# Altium PCB InterfaceBoard.PcbDoc
Units mil, origin at the board's own origin, x right, y up, seen from the top; angles counter-clockwise.
Board outline 3855 x 3822.5 mil, 2 copper layers (Top Layer, Bottom Layer); 52 components, 44 nets, 196 pads, 0 vias.
Unrouted connection lines stored in the file: 98.
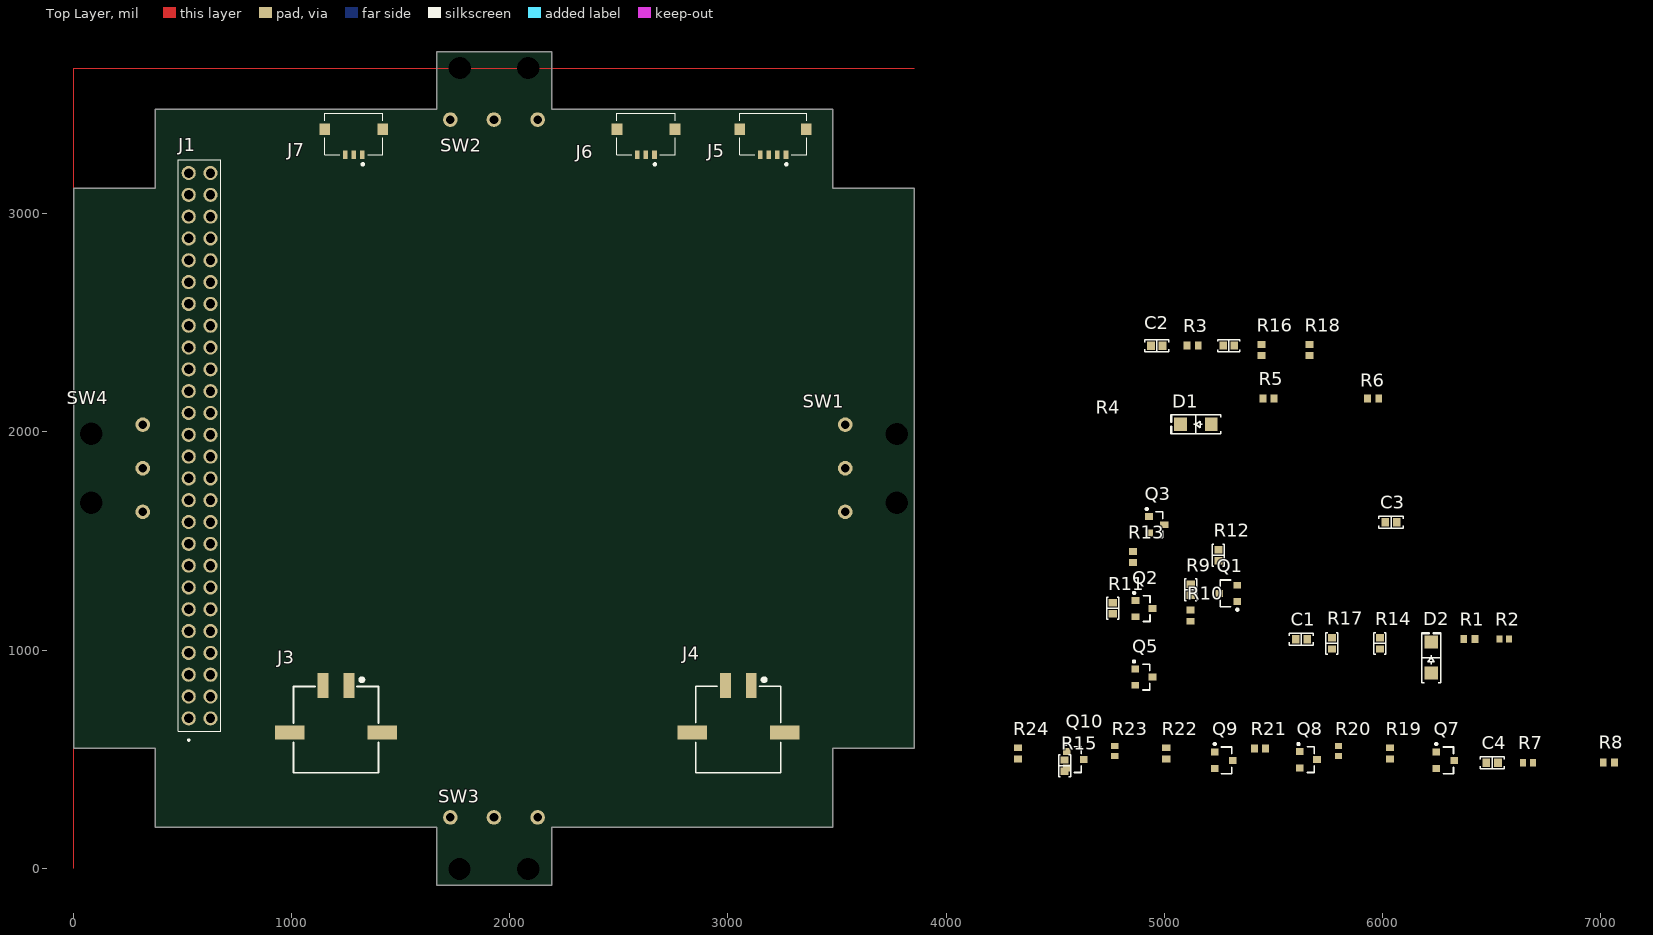
[diagram p0: Top Layer view]
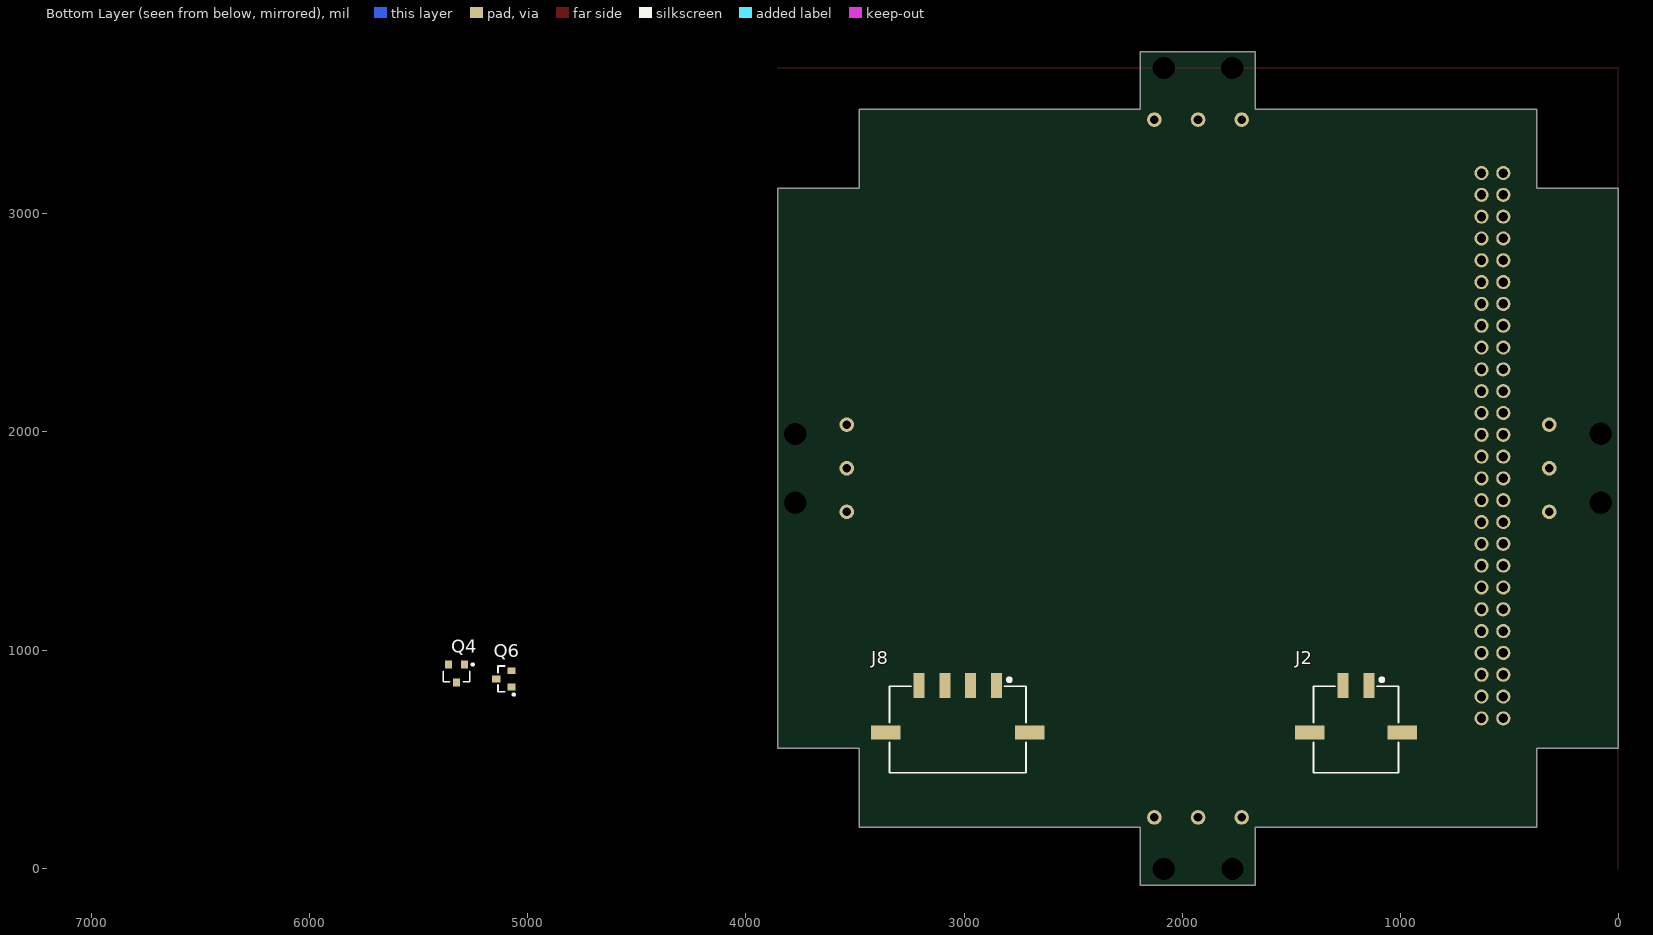
[diagram p1: Bottom Layer view, seen from below]

## Layer stack, top to bottom
Top Solder: solder mask 0.4, Solder Resist, Dk 3.5
Top Layer: signal copper 1.4
Dielectric 1: dielectric 12.6, FR-4, Dk 4.8
Bottom Layer: signal copper 1.4
Bottom Solder: solder mask 0.4, Solder Resist, Dk 3.5

## Board outline
375,3479.5 375,3117 0,3117 0,550 375,550 375,187.5 1666,187.5 1666,-78.5 2192,-78.5 2192,187.5 3480,187.5 3480,550 3853.5,550 3855,554.5 3855,3117 3480,3117 3480,3479.5 2192,3479.5 2192,3744 1666,3744 1666,3479.5

## Design rules (kind name [scope] priority, off if disabled: settings)
Clearance [All] p1: gap=10 ignorepadtopadclearanceinfootprint=FALSE except(0: Arc-Hole Track-Hole SMDPad-Hole THPad-Hole Via-Hole Fill-Hole Poly-Hole Region-Hole Text-Hole)
NetsToIgnore [InNet('GND')] p1 off:
PolygonConnect [All] p1: connectstyle=Relief reliefconductorwidth=10 reliefentries=4 polygonreliefangle="90 Angle" airgapwidth=10
RoutingVias [All] p1: holewidth=28 width=50 viastyle="Through Hole" minholewidth=28 minwidth=50 maxholewidth=28 maxwidth=50
SolderMaskExpansion [All] p1: expansion=4
Width [All] p1: maxlimit=50 minlimit=10 preferedwidth=10 minimp=50.000000 maximp=50.000000 favimp=50.000000
30 further rules are at their usual default settings.

## Classes and differential pairs
component class MEZZANINE: J1
component class EMatches: D1 D2 J2 J3 J8 Q1 Q2 Q3 Q4 Q5 Q6 R1 R2 R3 R4 R5 R6 R7 R8 R9 R10
component class Buzzer_and_Solenoid: J4 LS1 Q7 Q8 Q9 Q10 R19 R20 R21 R22 R23 R24
component class Board_Conns: J5 J6 J7
component class Deploy_Switches: C1 C2 C3 C4 R11 R12 R13 R14 R15 R16 R17 R18 SW1 SW2 SW3 SW4

## Components (designator, comment, footprint, x,y, rotation, side; value= is the part's Value field where it differs from the comment)
C1 "10000pF" "CAP 0603_1608" 5629.35,1050.5 r0 top
C2 "10000pF" "CAP 0603_1608" 4966,2396 r0 top
C3 "10000pF" "CAP 0603_1608" 6040,1586.5 r0 top
C4 "10000pF" "CAP 0603_1608" 6503.5,484 r0 top
D1 "Red" "LED 1206_3216 RED" 5145,2035 r180 top
D2 "Red" "LED 1206_3216 RED" 6224.35,965.5 r90 top
J1 "ESQ-126-39-G-D" SAMTEC_ESQ-126-39-G-D 528,687 r90 top
J2 "662102145021" 662102145021 1203.1,635.71 r180 bottom locked
J3 "662102145021" 662102145021 1203.55,635.43 r0 top locked
J4 "662102145021" 662102145021 3047.9,635.71 r0 top locked
J5 "SCH - CONNECTORS - 4 PIN + SHIELD" "PCB - CONNECTOR - MOLEX - PICO-LOCK 5037630491" 3207,3270.28 r180 top locked
J6 "SCH - CONNECTORS - 3 PIN + SHIELD" "PCB - CONNECTOR - MOLEX - PICO-LOCK 5037630391" 2624.19,3270.28 r180 top locked
J7 "SCH - CONNECTORS - 3 PIN + SHIELD" "PCB - CONNECTOR - MOLEX - PICO-LOCK 5037630391" 1285.2,3270.28 r180 top locked
J8 "662104145021" 662104145021 3028.99,635.71 r180 bottom locked
Q1 "SSM3J328R,LF" TOSH-SOT-23F_V 5294.34,1260 r180 top
Q2 "NTR4003NT3G" "ON SEMI SOT-23-3" 4907.5,1190 r0 top
Q3 "IRLML6344TRPBF" "INFINEON SOT-23-3" 4965.5,1574.5 r0 top
Q4 "SSM3J328R,LF" TOSH-SOT-23F_V 5327,892.5 r270 bottom
Q5 "NTR4003NT3G" "ON SEMI SOT-23-3" 4907,876 r0 top
Q6 "IRLML6344TRPBF" "INFINEON SOT-23-3" 5109.5,868 r0 bottom
Q7 "SSM3J328R,LF" TOSH-SOT-23F_V 6289,494.5 r0 top
Q8 "NTR4003NT3G" "ON SEMI SOT-23-3" 5661,497.5 r0 top
Q9 "SSM3J328R,LF" TOSH-SOT-23F_V 5273,494.5 r0 top
Q10 "NTR4003NT3G" "ON SEMI SOT-23-3" 4592.5,497.5 r0 top
R1 "CRCW060310K0FKEA" RESC1609X50X30NL8T20 6399.35,1050.5 r0 top value=10k
R2 "CRCW060312K0FKEA" RESC1609X50X30LL10T20 6559.35,1050.5 r0 top value=12k
R3 "CRCW060310K0FKEA" RESC1609X50X30NL8T20 5131,2396 r0 top value=10k
R4 "510 Ohms" "RES 0603_1608" 5296,2396 r0 top
R5 "CRCW060310K0FKEA" RESC1609X50X30NL8T20 5478,2154 r0 top value=10k
R6 "CRCW060310K0FKEA" RESC1609X50X30NL8T20 5958,2154 r0 top value=10k
R7 "CRCW060312K0FKEA" RESC1609X50X30LL10T20 6668.5,484 r0 top value=12k
R8 "CRCW060310K0FKEA" RESC1609X50X30NL8T20 7038.5,484 r0 top value=10k
R9 "510 Ohms" "RES 0603_1608" 5122,1276.5 r90 top
R10 "CRCW060310K0FKEA" RESC1609X50X30NL8T20 5120.5,1157.5 r90 top value=10k
R11 "1 kOhms" "RES 0603_1608" 4764,1192 r270 top value=10k
R12 "1 kOhms" "RES 0603_1608" 5248.5,1435 r90 top
R13 "CRCW060310K0FKEA" RESC1609X50X30NL8T20 4857.5,1426.91 r270 top value=10k
R14 "1 kOhms" "RES 0603_1608" 5989.35,1030.5 r90 top
R15 "1 kOhms" "RES 0603_1608" 4543.5,470 r90 top value=10k
R16 "CRCW060310K0FKEA" RESC1609X50X30NL8T20 5446,2376 r90 top value="1 kOhms"
R17 "1 kOhms" "RES 0603_1608" 5769.35,1030.5 r90 top value=10k
R18 "CRCW060310K0FKEA" RESC1609X50X30NL8T20 5666,2376 r90 top value="1 kOhms"
R19 "CRCW060310K0FKEA" RESC1609X50X30NL8T20 6035.5,526.5 r90 top value=10k
R20 "CRCW060312K0FKEA" RESC1609X50X30LL10T20 5799.5,536.5 r90 top value=12k
R21 "CRCW060310K0FKEA" RESC1609X50X30NL8T20 5439.5,548.5 r0 top value=10k
R22 "CRCW060310K0FKEA" RESC1609X50X30NL8T20 5009.5,526.5 r90 top value=10k
R23 "CRCW060312K0FKEA" RESC1609X50X30LL10T20 4773.5,536.5 r90 top value=12k
R24 "CRCW060310K0FKEA" RESC1609X50X30NL8T20 4329.5,526.5 r90 top value=10k
SW1 "D2HW-BR231DR" D2HW-BR231 3537.78,1923.5 r270 top locked
SW2 "D2HW-BR231DR" D2HW-BR231 1837.5,3432 r0 top locked
SW3 "D2HW-BR231DR" D2HW-BR231 2017.5,232.72 r180 top
SW4 "D2HW-BR231DR" D2HW-BR231 317.3,1743.5 r90 top locked

## Footprints (in the part's own frame and the unit in brackets; to place one, negate y for a bottom-side part, rotate by r counter-clockwise, add the part's x,y. Pads: shape width x height; smd on the part's side, far side on the other; paste and mask are expansions set on the pad)
662102145021 [mm] "3.00mm Male Single Row Angled Header, 2p"
  rect 1.27x2.92 smd: 1(1.5,5.12) 2(-1.5,5.12)
  rect 3.43x1.65 smd: MP1(-5.395,-0.35) MP2(5.395,-0.35)
  silkscreen extent -4.95,-5.02 4.95,6, body extent -6.82,-4.95 6.82,6.4, height 5.61
662104145021 [mm] "3.00mm Male Single Row Angled Header, 4p"
  rect 1.27x2.92 smd: 1(4.5,5.12) 2(1.5,5.12) 3(-1.5,5.12) 4(-4.5,5.12)
  rect 3.43x1.65 smd: MP1(-8.395,-0.35) MP2(8.395,-0.35)
  silkscreen extent -7.95,-5.02 7.95,6, body extent -9.82,-4.95 9.82,6.4, height 5.61
"CAP 0603_1608" [mm] "Chip Capacitor, 2-Leads, Body 1.60x0.80mm, IPC Medium Density"
  rect 0.9x1 smd: 1(-0.675,0) 2(0.675,0)
  silkscreen extent -1.4,-0.7 1.4,0.7, body extent -0.8,-0.41 0.8,0.41, height 0.82
D2HW-BR231 [mm]
  round 1.7 hole 1: 1(-2.794,0) 2(7.366,0) 3(2.286,0)
  round 1.524 hole 2.6 unplated: MH1(-1.711,6) MH2(6.29,6)
"INFINEON SOT-23-3" [mm] "SOT23, 3-Leads, Body 2.90x2.40mm, Pitch 0.95mm, IPC Medium Density"
  rect 0.972x0.802 smd: 1(-0.885,0.95) 2(-0.885,-0.95) 3(0.885,0)
  silkscreen extent -1.27,-1.5 0.7,1.95, body extent -1.16,-1.45 1.16,1.45, height 1
"LED 1206_3216 RED" [mm] "Chip Diode, 2-Leads, Body 3.13x1.55mm, IPC Medium Density"
  rect 1.5x1.6 smd: 1(-1.8,0) 2(1.8,0)
  silkscreen extent -2.92,-1.1 2.92,1.1, body extent -1.6,-0.8 1.6,0.8, height 0.9
"ON SEMI SOT-23-3" [mm] "SOT23, 3-Leads, Body 2.90x2.40mm, Pitch 0.95mm, IPC Medium Density"
  rect 0.9x0.8 smd: 1(-1,0.95) 2(-1,-0.95) 3(1,0)
  silkscreen extent -1.27,-1.5 0.7,1.95, body extent -1.16,-1.45 1.16,1.45, height 1
"PCB - CONNECTOR - MOLEX - PICO-LOCK 5037630391" [mm]
  rect 0.55x1 smd: 1(-0.992,0) 2(0.008,0) 3(1.008,0)
  rect 1.26x1.3 smd: S1(3.383,-2.99) S2(-3.367,-2.99)
  silkscreen extent -3.39,-4.86 3.41,1.2, body extent -3.82,-4.88 3.78,0.31, height 1.47
"PCB - CONNECTOR - MOLEX - PICO-LOCK 5037630491" [mm]
  rect 0.55x1 smd: 1(-1.5,0) 2(-0.5,0) 3(0.5,0) 4(1.5,0)
  rect 1.26x1.3 smd: S1(3.875,-2.99) S2(-3.875,-2.99)
  silkscreen extent -3.9,-4.86 3.9,1.2, body extent -4.32,-4.88 4.28,0.31, height 1.47
"RES 0603_1608" [mm] "Chip Resistor, 2-Leads, Body 1.60x0.80mm, IPC Medium Density"
  rect 0.85x0.95 smd: 1(-0.65,0) 2(0.65,0)
  silkscreen extent -1.27,-0.7 1.27,0.7, body extent -0.8,-0.4 0.8,0.4, height 0.45
RESC1609X50X30LL10T20 [mm] "Chip Resistor, 2-Leads, Body 1.55x0.85mm, IPC High Density"
  rect 0.7x0.85 smd: 1(-0.575,0) 2(0.575,0)
  body extent -0.82,-0.48 0.82,0.48, height 0.5
RESC1609X50X30NL8T20 [mm] "Chip Resistor, 2-Leads, Body 1.65x0.95mm, IPC Medium Density"
  rect 0.8x0.95 smd: 1(-0.65,0) 2(0.65,0)
  body extent -0.82,-0.48 0.82,0.48, height 0.5
SAMTEC_ESQ-126-39-G-D [mm]
  round 1.65 hole 1.1: 1(0,0) 2(0,-2.54) 3(2.54,0) 4(2.54,-2.54) 5(5.08,0) 6(5.08,-2.54) 7(7.62,0) 8(7.62,-2.54) 9(10.16,0) 10(10.16,-2.54) 11(12.7,0) 12(12.7,-2.54) 13(15.24,0) 14(15.24,-2.54) 15(17.78,0) 16(17.78,-2.54) 17(20.32,0) 18(20.32,-2.54) 19(22.86,0) 20(22.86,-2.54) 21(25.4,0) 22(25.4,-2.54) 23(27.94,0) 24(27.94,-2.54) 25(30.48,0) 26(30.48,-2.54) 27(33.02,0) 28(33.02,-2.54) 29(35.56,0) 30(35.56,-2.54) 31(38.1,0) 32(38.1,-2.54) 33(40.64,0) 34(40.64,-2.54) 35(43.18,0) 36(43.18,-2.54) 37(45.72,0) 38(45.72,-2.54) 39(48.26,0) 40(48.26,-2.54) 41(50.8,0) 42(50.8,-2.54) 43(53.34,0) 44(53.34,-2.54) 45(55.88,0) 46(55.88,-2.54) 47(58.42,0) 48(58.42,-2.54) 49(60.96,0) 50(60.96,-2.54) 51(63.5,0) 52(63.5,-2.54)
  silkscreen extent -2.64,-3.74 65.03,1.2
TOSH-SOT-23F_V [mm] "SOTFL, 3-Leads, Body 3.1x1.9mm, Pitch 0.95mm"
  rect 0.9x0.8 smd: 1(-1.05,0.95) 2(-1.05,-0.95) 3(1.05,0)
  silkscreen extent -1.18,-1.55 0.95,2.02, body extent -1.2,-1.55 1.2,1.55, height 0.88

## Part data
C1 C2 C3 C4: library part C0603S103K4RACTU, "CAP CER 10000PF 16V X7R 0603", Device Package="0603 (1608 Metric)", Manufacturer=KEMET, Operating Temperature="-55°C ~ 125°C", Supplier Part Number 1=399-9135-1-ND, Temperature Coefficient=X7R, Tolerance=±10%, Voltage - Rated=16V, Applications="Boardflex Sensitive", Capacitance=10000pF, ComponentLink1Description=Datasheet, ComponentLink1URL=https://api.kemet.com/component-edge/download/datasheet/C0603S103K4RACTU.pdf, ComponentLink2Description="DigiKey Link", ComponentLink2URL=http://digikey.com/product-detail/en/kemet/C0603S103K4RACTU/399-9135-1-ND/3522653, Features="Floating Electrode", LastUpdated="1/21/2020 12:02:08 AM", Lifecycle Status=Active, Minimum Order=1, Mounting Type="Surface Mount, MLCC", Package / Case="0603 (1608 Metric)", Packaging=TapeAndReel, PartId=3312, Part Number=C0603S103K4RACTU, Part Status=Active, Price=0.07, Series="SMD Comm X7R FE", Size / Dimension="0.063\" L x 0.031\" W (1.60mm x 0.80mm)", Supplier 1=DigiKey, Thickness (Max)="0.034\" (0.87mm)"
D1 D2: library part HSMC-C350, "LED RED CHIP SMD", Current - Test=20mA, Device Package="1206 (3216 Metric)", Lens Color=1.20mm, Manufacturer="Broadcom Limited", Supplier Device Package="Chip LED", Supplier Part Number 1=516-4369-1-ND, Voltage - Forward (Vf) (Typ)=2V, Color=Red, ComponentLink1Description=Datasheet, ComponentLink1URL=https://docs.broadcom.com/docs/HSMC-C350-DS100, ComponentLink2Description="DigiKey Link", ComponentLink2URL=http://digikey.com/product-detail/en/broadcom-limited/HSMC-C350/516-4369-1-ND/10239796, Configuration=Standard, Height (Max)=1.20mm, LastUpdated="1/21/2020 3:14:28 AM", Lens Size="1.10mm Dia", Lens Style="Round with Domed Top", Lifecycle Status=Active, Minimum Order=1, Mounting Type="Surface Mount", Package / Case="1206 (3216 Metric)", Packaging=TapeAndReel, PartId=195, Part Number=HSMC-C350, Part Status=Active, Price=0.21, Series=-, Size / Dimension="3.20mm L x 1.60mm W", Supplier 1=DigiKey, Viewing Angle=70°, Wavelength - Dominant=630nm, Wavelength - Peak=643nm
J1: "52 Position Elevated Socket Connector Through Hole", Package=None, Digi-Key_Part_Number=SAM10462-ND, Digi-Key_Purchase_URL=https://www.digikey.com/product-detail/en/samtec-inc/ESQ-126-39-G-D/SAM10462-ND/3601055?utm_source=snapeda&utm_medium=aggregator&utm_campaign=symbol, MF=Samtec, MP=ESQ-126-39-G-D, SnapEDA_Link=https://www.snapeda.com/parts/ESQ-126-39-G-D/Samtec%20Inc./view-part/490181/?ref=snap
J2 J3 J4: library part CMP-1502-00482-1, "SMT Male Header WR-MPC3, with SMT Solder Tabs, Right Angled, Single Row, pitch 3 mm, 2 pins", Contact Resistance=10mOhm, Manufacturer="Wurth Elektronik", Operating Temperature=-40to105degC, Working Voltage=250VAC, Datasheet URL=https://katalog.we-online.de/em/datasheet/6621xx145021.pdf, Gender=Male, Manufacturer URL=http://www.we-online.de, Mounting Technology=SMT, Orientation=RightAngled, Package Reference=662102145021, Packaging=TapeandReel, Part Number=662102145021, Pin Number=2, Pitch=3mm, Publisher=WurthElektronik
J5 J6: "Connector Header Surface Mount, Right Angle 4 position 0.039 _1.00mm_", Package=None, Availability=Unavailable, MF=Molex, MP=5037630491, Price=None, SnapEDA_Link=https://www.snapeda.com/parts/5037630491/Molex/view-part/3215405/?ref=snap
J7: "Connector Header Surface Mount, Right Angle 4 position 0.039 _1.00mm_", Contact Resistance=10mOhm, Manufacturer="Wurth Elektronik", Operating Temperature=-40to105degC, Package Reference=662103145021, Working Voltage=250VAC, Datasheet URL=https://katalog.we-online.de/em/datasheet/6621xx145021.pdf, Gender=Male, Manufacturer URL=http://www.we-online.de, Mounting Technology=SMT, Orientation=RightAngled, Packaging=TapeandReel, Part Number=662103145021, Pin Number=3, Pitch=3mm, Publisher=WurthElektronik
J8: library part CMP-1502-00484-1, "SMT Male Header WR-MPC3, with SMT Solder Tabs, Right Angled, Single Row, pitch 3 mm, 4 pins", Contact Resistance=10mOhm, Manufacturer="Wurth Elektronik", Operating Temperature=-40to105degC, Working Voltage=250VAC, Datasheet URL=https://katalog.we-online.de/em/datasheet/6621xx145021.pdf, Gender=Male, Manufacturer URL=http://www.we-online.de, Mounting Technology=SMT, Orientation=RightAngled, Package Reference=662104145021, Packaging=TapeandReel, Part Number=662104145021, Pin Number=4, Pitch=3mm, Publisher=WurthElektronik
Q1 Q4 Q7 Q9: library part CMP-2100-03686-1, "TOSHIBA Field-Effect Transistor Silicon P-Channel MOS Type (U-MOS VI), 20 V, -55 to 125 degC, 3-Pin SOTFL, RoHS, Tape and Reel", Case/Package=SOT-23-3, Continuous Drain Current (ID)=6A, Drain to Source Breakdown Voltage=-20V, Drain to Source Resistance=47.4mOhm, Drain to Source Voltage (Vdss)=20V, Gate to Source Voltage (Vgs)=8V, Input Capacitance=840pF, Manufacturer=Toshiba, Max Operating Temperature=150degC, Max Power Dissipation=1W, Min Operating Temperature=-55degC, Package Description="3-Pin Small Outline Transistor, Flat Lead, Body 2.9 x 1.8 mm, Pitch 0.95 mm", Package Quantity=3000, Package Reference=SOT-23F, Power Dissipation=2W, Datasheet URL=https://toshiba.semicon-storage.com/info/docget.jsp?did=2429&prodName=SSM3J328R, Datasheet Version=41699.0, Element Configuration=Single, Manufacturer URL=http://www.toshiba.com/, Mount=SurfaceMount, Number of Channels=1, Number of Elements=1, Number of Pins=3, Package URL=https://toshiba.semicon-storage.com/ap-en/design-support/package/detail.SOT-23F.html, Packaging=TapeandReel, Radiation Hardening=No, Rds On Max=29.8mOhm, RoHSCompliant=true, Turn-Off Delay Time=107ns, Turn-On Delay Time=32ns
Q2 Q5 Q8 Q10: "MOSFET N-CH 30V 500MA SOT-23", Current - Continuous Drain (Id) @ 25°C="500mA (Ta)", Device Package="TO-236-3, SC-59, SOT-23-3", Drain to Source Voltage (Vdss)=30V, Drive Voltage (Max Rds On,  Min Rds On)="2.5V, 4V", Input Capacitance (Ciss) (Max) @ Vds="21pF @ 5V", Manufacturer="ON Semiconductor", Operating Temperature="-55°C ~ 150°C (TJ)", Power Dissipation (Max)="690mW (Ta)", Supplier Device Package="SOT-23-3 (TO-236)", Supplier Part Number 1=NTR4003NT3GOSCT-ND, ComponentLink1Description=Datasheet, ComponentLink1URL=http://www.onsemi.com/pub/Collateral/NTR4003N-D.PDF, ComponentLink2Description="DigiKey Link", ComponentLink2URL=http://digikey.com/product-detail/en/on-semiconductor/NTR4003NT3G/NTR4003NT3GOSCT-ND/1967271, FET Type=N-Channel, Gate Charge (Qg) (Max) @ Vgs="1.15nC @ 5V", LastUpdated="1/21/2020 4:01:12 AM", Lifecycle Status=Active, Minimum Order=1, Mounting Type="Surface Mount", Package / Case="TO-236-3, SC-59, SOT-23-3", Packaging=TapeAndReel, Part Number=NTR4003NT3G, Part Status=Active, Price=0.04, Rds On (Max) @ Id, Vgs="1.5Ohm @ 10mA, 4V", Series=-, Supplier 1=DigiKey, Technology="MOSFET (Metal Oxide)", Vgs (Max)=±20V, Vgs(th) (Max) @ Id="1.4V @ 250µA"
Q3 Q6: "MOSFET N-CH 30V 5A SOT23", Current - Continuous Drain (Id) @ 25°C="5A (Ta)", Device Package="TO-236-3, SC-59, SOT-23-3", Drain to Source Voltage (Vdss)=30V, Drive Voltage (Max Rds On,  Min Rds On)="2.5V, 4.5V", Input Capacitance (Ciss) (Max) @ Vds="650pF @ 25V", Manufacturer="Infineon Technologies", Operating Temperature="-55°C ~ 150°C (TJ)", Power Dissipation (Max)="1.3W (Ta)", Supplier Device Package=Micro3™/SOT-23, Supplier Part Number 1=IRLML6344TRPBFCT-ND, ComponentLink1Description=Datasheet, ComponentLink1URL=https://www.infineon.com/dgdl/irlml6344pbf.pdf?fileId=5546d462533600a4015356689c44262c, ComponentLink2Description="DigiKey Link", ComponentLink2URL=http://digikey.com/product-detail/en/infineon-technologies/IRLML6344TRPBF/IRLML6344TRPBFCT-ND/2538168, FET Type=N-Channel, Gate Charge (Qg) (Max) @ Vgs="6.8nC @ 4.5V", LastUpdated="1/21/2020 4:00:48 AM", Lifecycle Status=Active, Minimum Order=1, Mounting Type="Surface Mount", Package / Case="TO-236-3, SC-59, SOT-23-3", Packaging=TapeAndReel, Part Number=IRLML6344TRPBF, Part Status=Active, Price=0.12, Rds On (Max) @ Id, Vgs="29mOhm @ 5A, 4.5V", Series=HEXFET®, Supplier 1=DigiKey, Technology="MOSFET (Metal Oxide)", Vgs (Max)=±12V, Vgs(th) (Max) @ Id="1.1V @ 10µA"
R1 R3 R5 R6 R8 R10 R11 R13 R15 R17 R19 R21 R22 R24: library part CMP-1666-00005-4, "Chip Resistor, 10 KOhm, +/- 1%, 100 mW, -55 to 155 degC, 0603 (1608 Metric), RoHS, Tape and Reel", Manufacturer="Vishay Semiconductor", Max Operating Temperature="155 degC", Min Operating Temperature="-55 degC", Package Quantity=5000, Voltage Rating="75 V", ComponentLink1Description="Manufacturer URL", ComponentLink1URL=http://www.vishay.com/, ComponentLink2Description=Datasheet, ComponentLink2URL=https://datasheet.ciiva.com/11809/0900766b80d98afc-11809037.pdf, DatasheetVersion=06/2012, Height="0.45 mm", Length="1.55 mm", Mounting Technology="Surface Mount", PackageDescription="2-Pin Surface Mount Device, Body 1.575 x 0.85 mm", PackageReference=0603, Packaging="Tape and Reel", REACH SVHC=Unknown, RoHSCompliant=true
R2 R7 R20 R23: library part CMP-2000-03877-1, Manufacturer="Vishay Dale", Part Number=CRCW060312K0FKEA
R4 R9: library part CRCW0603510RFKEAHP, "RES SMD 510 OHM 1% 1/4W 0603", Device Package="0603 (1608 Metric)", Manufacturer="Vishay Dale", Operating Temperature="-55°C ~ 155°C", Power (Watts)="0.25W, 1/4W", Ratings=AEC-Q200, Supplier Device Package=0603, Supplier Part Number 1=541-510SCT-ND, Temperature Coefficient=±100ppm/°C, Tolerance=±1%, ComponentLink1Description=Datasheet, ComponentLink1URL=http://www.vishay.com/docs/20043/crcwhpe3.pdf, ComponentLink2Description="DigiKey Link", ComponentLink2URL=http://digikey.com/product-detail/en/vishay-dale/CRCW0603510RFKEAHP/541-510SCT-ND/5326852, Composition="Thick Film", Features="Automotive AEC-Q200, Pulse Withstanding", Height - Seated (Max)="0.022\" (0.55mm)", LastUpdated="1/21/2020 12:20:58 AM", Lifecycle Status=Active, Minimum Order=1, Number of Terminations=2, Package / Case="0603 (1608 Metric)", Packaging=TapeAndReel, PartId=14772, Part Number=CRCW0603510RFKEAHP, Part Status=Active, Price=0.02, Resistance="510 Ohms", Series=CRCW-HP, Size / Dimension="0.063\" L x 0.033\" W (1.60mm x 0.85mm)", Supplier 1=DigiKey
R12 R14: library part CPF0603B1K0E, "RES SMD 1K OHM 0.1% 1/16W 0603", Device Package="0603 (1608 Metric)", Manufacturer="TE Connectivity Passive Product", Operating Temperature="-55°C ~ 155°C", Power (Watts)="0.063W, 1/16W", Supplier Device Package=0603, Supplier Part Number 1=A119887CT-ND, Temperature Coefficient=±25ppm/°C, Tolerance=±0.1%, ComponentLink1Description=Datasheet, ComponentLink1URL=https://www.te.com/commerce/DocumentDelivery/DDEController?Action=srchrtrv&DocNm=1773200&DocType=DS&DocLang=English, ComponentLink2Description="DigiKey Link", ComponentLink2URL=http://digikey.com/product-detail/en/te-connectivity-passive-product/CPF0603B1K0E/A119887CT-ND/4966485, Composition="Thin Film", Height - Seated (Max)="0.022\" (0.55mm)", LastUpdated="1/21/2020 12:24:55 AM", Lifecycle Status=Active, Minimum Order=1, Number of Terminations=2, Package / Case="0603 (1608 Metric)", Packaging=TapeAndReel, PartId=4877, Part Number=CPF0603B1K0E, Part Status=Active, Price=0.09, Resistance="1 kOhms", Series="CPF, Neohm", Size / Dimension="0.061\" L x 0.031\" W (1.55mm x 0.80mm)", Supplier 1=DigiKey
R16 R18: library part CPF0603B1K0E, "RES SMD 1K OHM 0.1% 1/16W 0603", Device Package="0603 (1608 Metric)", Manufacturer="TE Connectivity Passive Product", Operating Temperature="-55°C ~ 155°C", Power (Watts)="0.063W, 1/16W", Resistance="1 kOhms", Supplier Device Package=0603, Supplier Part Number 1=A119887CT-ND, Temperature Coefficient=±25ppm/°C, Tolerance=±0.1%, ComponentLink1Description=Datasheet, ComponentLink1URL=https://www.te.com/commerce/DocumentDelivery/DDEController?Action=srchrtrv&DocNm=1773200&DocType=DS&DocLang=English, ComponentLink2Description="DigiKey Link", ComponentLink2URL=http://digikey.com/product-detail/en/te-connectivity-passive-product/CPF0603B1K0E/A119887CT-ND/4966485, Composition="Thin Film", Height - Seated (Max)="0.022\" (0.55mm)", LastUpdated="1/21/2020 12:24:55 AM", Lifecycle Status=Active, Minimum Order=1, Number of Terminations=2, Package / Case="0603 (1608 Metric)", Packaging=TapeAndReel, PartId=4877, Part Number=CPF0603B1K0E, Part Status=Active, Price=0.09, Series="CPF, Neohm", Size / Dimension="0.061\" L x 0.031\" W (1.55mm x 0.80mm)", Supplier 1=DigiKey

## Nets (pads, with @x,y where several pads share a name; then routed paths per layer and width w, separated by ;. In a path a pad name is that pad's centre, name@x,y a point inside that pad or via, vN(x,y) a via of type N, cw(c..) or ccw(c..) an arc to the next point about the centre after c; other vN are vias at no path point)
3V3: J1.6 J1.8 R11.2 R13.2 R15.2 R17.2
5V: J1.5 J1.7 J5.1
12V: J1.1 J1.3 J6.1
ARM_EMATCH_0: J1.14 Q5.1 R8.1
ARM_EMATCH_1: J1.18 Q2.1 R3.1
BUZZER: J1.46 Q10.1 R24.1
DEPLOY_DET_0: C1.2 J1.22 R12.1
DEPLOY_DET_1: C2.2 J1.26 R13.1 R14.1
DEPLOY_DET_2: C3.2 J1.30 R16.1
DEPLOY_DET_3: C4.2 J1.34 R18.1
EMATCH_IN_1: J2.1 Q1.3 R4.1
EMATCH_IN_2: J3.1 Q4.3 R9.1
EMATCH_OUT_1: J2.2 Q3.3
EMATCH_OUT_2: J3.2 Q6.3
FIRE_EMATCH_0: J1.38 Q6.1 R10.1
FIRE_EMATCH_1: J1.42 Q3.1 R5.1
GND: C1.1 C2.1 C3.1 C4.1 D1.2 D2.2 J1.9 J1.10 J1.29 J1.35 J1.41 J1.49 J1.50 J1.51 J1.52 J4.2 J5.4 J5.S1 J5.S2 J6.3 J6.S1 J6.S2 J7.3 Q2.2 Q3.2 Q5.2 Q6.2 Q8.2 Q10.2 R3.2 R5.2 R8.2 R10.2 R21.2 R24.2 SW1.2 SW2.2 SW3.2 SW4.2
I2C0_SCL: J1.37 J5.3
I2C0_SDA: J1.39 J5.2
NetD1_1: D1.1 R4.2
NetD2_1: D2.1 R9.2
NetJ4_1: J4.1 Q7.3
NetLS1_P: Q9.3
NetQ1_1: Q1.1 R1.1 R2.2
NetQ2_3: Q2.3 R2.1
NetQ4_1: Q4.1 R6.1 R7.2
NetQ5_3: Q5.3 R7.1
NetQ7_1: Q7.1 R19.1 R20.2
NetQ7_2: Q7.2 R19.2
NetQ8_3: Q8.3 R20.1
NetQ9_1: Q9.1 R22.1 R23.2
NetQ9_2: Q9.2 R22.2
NetQ10_3: Q10.3 R23.1
NetR12_2: R12.2 SW1.1
NetR14_2: R14.2 SW2.1
NetR16_2: R16.2 SW3.1
NetR18_2: R18.2 SW4.1
RBF_OUT_1: J8.2 Q1.2 R1.2
RBF_OUT_2: J8.4 Q4.2 R6.2
SCIENCE_LED: J1.43 J6.2
SOLENOID: J1.48 Q8.1 R21.1
UART1_S2T: J1.33 J7.2
UART1_T2S: J1.31 J7.1
VBATT: J1.2 J1.4 J8.1 J8.3
pads on no net: J1.11 J1.12 J1.13 J1.15 J1.16 J1.17 J1.19 J1.20 J1.21 J1.23 J1.24 J1.25 J1.27 J1.28 J1.32 J1.36 J1.40 J1.44 J1.45 J1.47 J2.MP1 J2.MP2 J3.MP1 J3.MP2 J4.MP1 J4.MP2 J7.S1 J7.S2 J8.MP1 J8.MP2 R11.1 R15.1 R17.1 SW1.3 SW1.MH1 SW1.MH2 SW2.3 SW2.MH1 SW2.MH2 SW3.3 SW3.MH1 SW3.MH2 SW4.3 SW4.MH1 SW4.MH2
copper on no net: | length 7521
  Top Layer w3.94: 0,0 0,2 0,3667 3854,3667